# Altium PCB Nitrous_Controller_Panel.PcbDoc
Units mil, origin at the board's own origin, x right, y up, seen from the top; angles counter-clockwise.
Board outline 5350 x 5850 mil, 2 copper layers (Top Layer, Bottom Layer); 74 components, 0 nets, 388 pads, 10 vias.
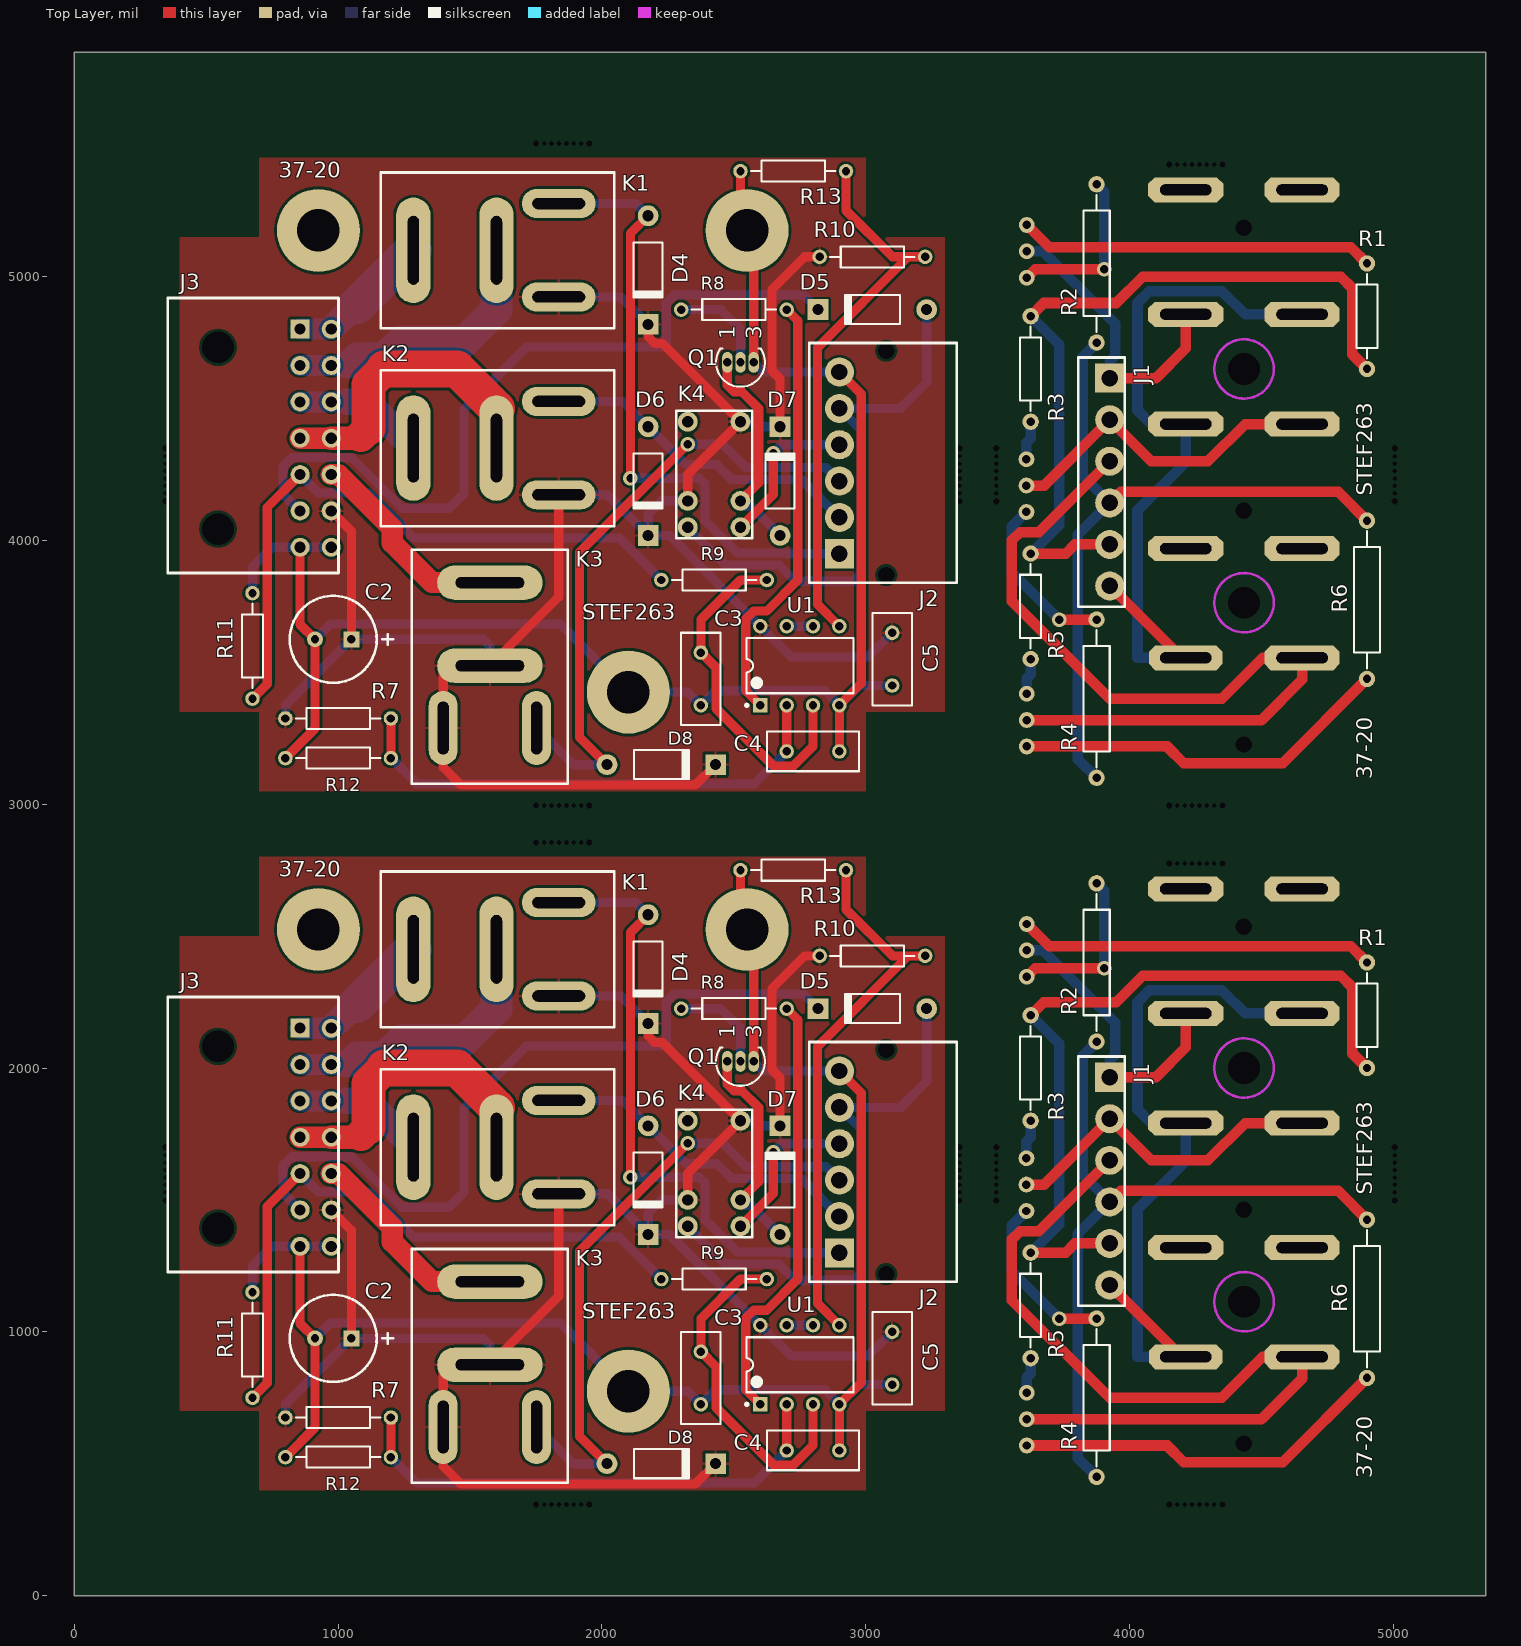
[diagram p0: Top Layer view]
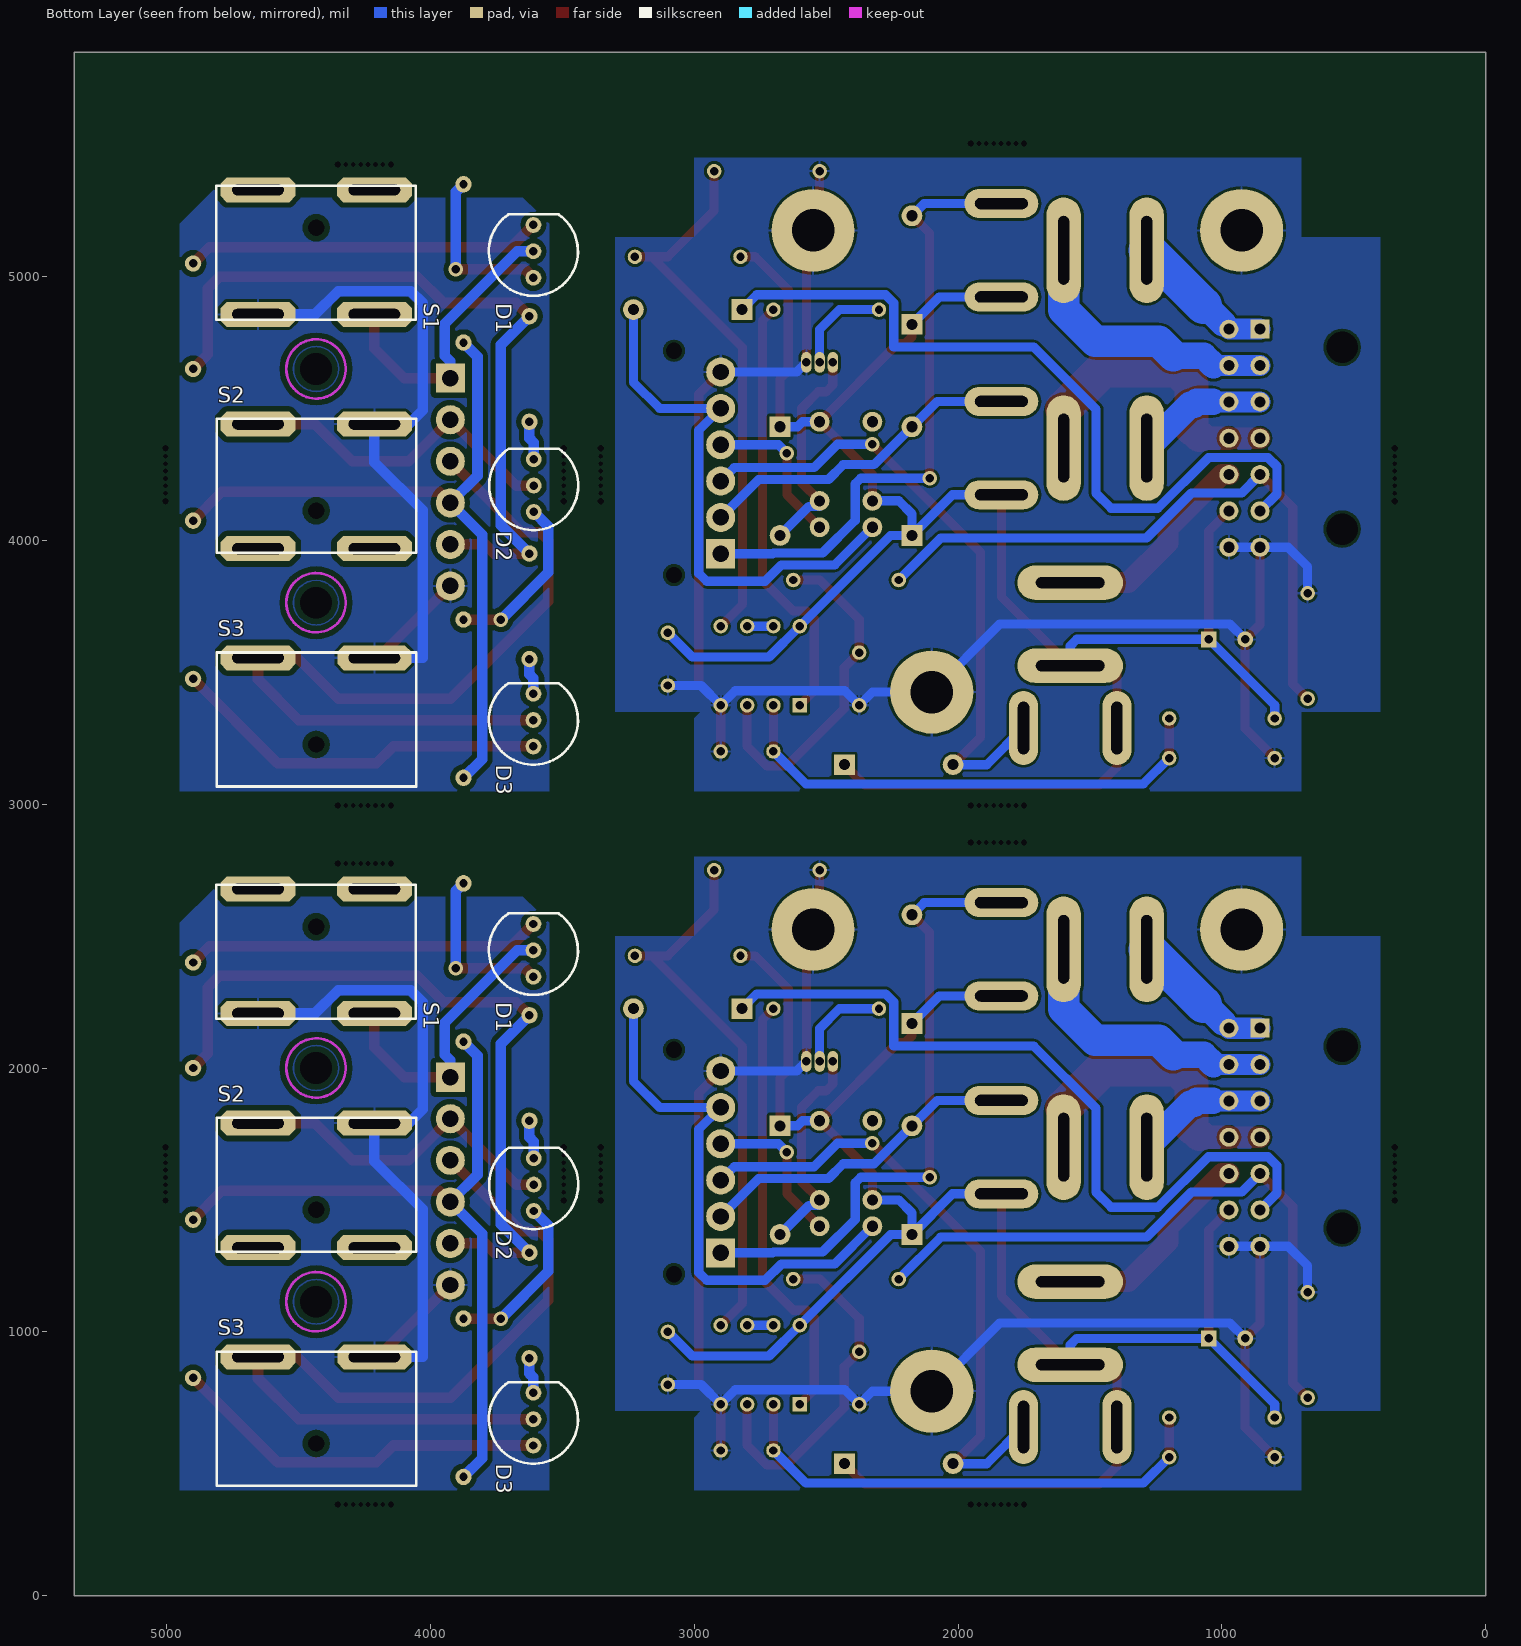
[diagram p1: Bottom Layer view, seen from below]

## Layer stack, top to bottom
Top Solder: solder mask 0.4, Solder Resist, Dk 3.5
Top Layer: signal copper 1.4
Dielectric 1: dielectric 12.6, FR-4, Dk 4.8
Bottom Layer: signal copper 1.4
Bottom Solder: solder mask 0.4, Solder Resist, Dk 3.5

## Board outline
0,0 0,5850 5350,5850 5350,0

## Design rules (kind name [scope] priority, off if disabled: settings)
Clearance [All] p1: gap=10 ignorepadtopadclearanceinfootprint=FALSE
ComponentClearance [All] p1: gap=5 collisioncheckmode=3 verticalgap=10 showdistances=FALSE
PolygonConnect [All] p1: connectstyle=Relief reliefconductorwidth=10 reliefentries=4 polygonreliefangle="90 Angle" airgapwidth=10
RoutingVias [All] p1: holewidth=28 width=50 viastyle="Through Hole" minholewidth=28 minwidth=50 maxholewidth=28 maxwidth=50
ShortCircuit [All] p1: allowed=TRUE
SolderMaskExpansion [All] p1: expansion=4
UnpouredPolygon [All] p1 off:
Width [All] p1: maxlimit=200 minlimit=10 preferedwidth=35
27 further rules are at their usual default settings.

## Components (designator, comment, footprint, x,y, rotation, side; value= is the part's Value field where it differs from the comment)
C2 "Cap Pol1" RB_3.5MM 1050,3625 r180 top value=100uF/25V
C2 "Cap Pol1" RB_3.5MM 1050,975 r180 top value=100uF/25V
C3 "Cap" RAD-0.2 2375,3475 r90 top value=1uF/16V
C3 "Cap" RAD-0.2 2375,825 r90 top value=1uF/16V
C4 "Cap" RAD-0.2 2800,3200 r180 top value=1uF/16V
C4 "Cap" RAD-0.2 2800,550 r180 top value=1uF/16V
C5 "Cap" RAD-0.2 3100,3550 r90 top value=1uF/16V
C5 "Cap" RAD-0.2 3100,900 r90 top value=1uF/16V
D1 "NOS" DIODE_2COLOR_RAD 3660,5246 r270 bottom
D1 "NOS" DIODE_2COLOR_RAD 3660,2596 r270 bottom
D2 "HEATER" DIODE_2COLOR_RAD 3659,4358 r270 bottom
D2 "HEATER" DIODE_2COLOR_RAD 3659,1708 r270 bottom
D3 "PURGE" DIODE_2COLOR_RAD 3660,3469 r270 bottom
D3 "PURGE" DIODE_2COLOR_RAD 3660,819 r270 bottom
D4 "1N4001" DO-41 2175,5025 r270 top
D4 "1N4001" DO-41 2175,2375 r270 top
D5 "1N4001" DO-41 3025,4875 r180 top
D5 "1N4001" DO-41 3025,2225 r180 top
D6 "1N4001" DO-41 2175,4225 r270 top
D6 "1N4001" DO-41 2175,1575 r270 top
D7 "1N4001" DO-41 2675,4225 r90 top
D7 "1N4001" DO-41 2675,1575 r90 top
D8 "1N4001" DO-41 2225,3150 r0 top
D8 "1N4001" DO-41 2225,500 r0 top
J1 "FP_CONNECTOR" MOLEX_51036_6POS 3925,4614.96 r270 top
J1 "FP_CONNECTOR" MOLEX_51036_6POS 3925,1964.96 r270 top
J2 "FP_CONNECTOR" MOLEX_5329_6POS_RA 3077.17,3868.7 r90 top
J2 "FP_CONNECTOR" MOLEX_5329_6POS_RA 3077.17,1218.7 r90 top
J3 "Molex 1723161114" MOLEX_ULTRA_FIT_14_POS_RA 855.42,4800.87 r270 top
J3 "Molex 1723161114" MOLEX_ULTRA_FIT_14_POS_RA 855.42,2150.87 r270 top
K1 "ACV31012" RL_MICRO_ISO_ACV 1836,5277 r180 top
K1 "ACV31012" RL_MICRO_ISO_ACV 1836,2627 r180 top
K2 "ACV31012" RL_MICRO_ISO_ACV 1836,4527 r180 top
K2 "ACV31012" RL_MICRO_ISO_ACV 1836,1877 r180 top
K3 "ACV31012" RL_MICRO_ISO_ACV 1752,3289 r90 top
K3 "ACV31012" RL_MICRO_ISO_ACV 1752,639 r90 top
K4 "G5V-1-2 DC12" RL_G5V-1 2525,4050 r90 top
K4 "G5V-1-2 DC12" RL_G5V-1 2525,1400 r90 top
Q1 "2N3904" TO-92 2525,4675 r90 top
Q1 "2N3904" TO-92 2525,2025 r90 top
R1 "Res1" AXIAL-0.4#1 4900,4850 r90 top value=4.7k
R1 "Res1" AXIAL-0.4#1 4900,2200 r90 top value=4.7k
R2 "Res1" AXIAL-0.6 3875,5050 r90 top value=470/1W
R2 "Res1" AXIAL-0.6 3875,2400 r90 top value=470/1W
R3 "Res1" AXIAL-0.4#1 3625,4650 r270 top value=4.7k
R3 "Res1" AXIAL-0.4#1 3625,2000 r270 top value=4.7k
R4 "Res1" AXIAL-0.6 3875,3400 r90 top value=470/1W
R4 "Res1" AXIAL-0.6 3875,750 r90 top value=470/1W
R5 "Res1" AXIAL-0.4#1 3625,3750 r270 top value=4.7k
R5 "Res1" AXIAL-0.4#1 3625,1100 r270 top value=4.7k
R6 "Res1" AXIAL-0.6 4900,3775 r270 top value=470/1W
R6 "Res1" AXIAL-0.6 4900,1125 r270 top value=470/1W
R7 "Res1" AXIAL-0.4#2 1000,3325 r0 top value=8.2K
R7 "Res1" AXIAL-0.4#2 1000,675 r0 top value=8.2K
R8 "Res1" AXIAL-0.4#2 2500,4875 r180 top value=10K
R8 "Res1" AXIAL-0.4#2 2500,2225 r180 top value=10K
R9 "Res1" AXIAL-0.4#2 2425,3850 r180 top value=10K
R9 "Res1" AXIAL-0.4#2 2425,1200 r180 top value=10K
R10 "Res1" AXIAL-0.4#2 3025,5075 r0 top value=10K
R10 "Res1" AXIAL-0.4#2 3025,2425 r0 top value=10K
R11 "Res1" AXIAL-0.4#2 675,3600 r270 top value=10K
R11 "Res1" AXIAL-0.4#2 675,950 r270 top value=10K
R12 "Res1" AXIAL-0.4#2 1000,3175 r180 top value=1K
R12 "Res1" AXIAL-0.4#2 1000,525 r180 top value=1K
R13 "Res1" AXIAL-0.4#2 2725,5400 r0 top value=10K
R13 "Res1" AXIAL-0.4#2 2725,2750 r0 top value=10K
S1 "NOS_SW" PA4_DPST 4213,4857 r90 bottom
S1 "NOS_SW" PA4_DPST 4213,2207 r90 bottom
S2 "HEATER_SW" PA4_DPST 4654,4441 r270 bottom
S2 "HEATER_SW" PA4_DPST 4654,1791 r270 bottom
S3 "PURGE_SW" PA4_SPST 4654,3555 r270 bottom
S3 "PURGE_SW" PA4_SPST 4654,905 r270 bottom
U1 "LM358" DIP-8 2750,3525 r90 top
U1 "LM358" DIP-8 2750,875 r90 top

## Footprints (in the part's own frame and the unit in brackets; to place one, negate y for a bottom-side part, rotate by r counter-clockwise, add the part's x,y. Pads: shape width x height; smd on the part's side, far side on the other; paste and mask are expansions set on the pad)
AXIAL-0.4#1 [mil] "Axial Device, Thru-Hole; 2 Leads; 0.4 in Pin Spacing"
  round 62 hole 32: 1(-200,0) 2(200,0)
  silkscreen extent -160,-40 160,40
AXIAL-0.4#2 [mil] "Axial Device, Thru-Hole; 2 Leads; 0.4 in Pin Spacing"
  round 55.12 hole 32: 1(-200,0) 2(200,0)
  silkscreen extent -160,-40 160,40
AXIAL-0.6 [mil] "Axial Device, Thru-Hole; 2 Leads; 0.6 in Pin Spacing"
  round 62 hole 32: 1(-300,0) 2(300,0)
  silkscreen extent -260,-50 260,50
DIODE_2COLOR_RAD [mil]
  round 60 hole 32: 1(50,50) 2(150,50) 3(250,50)
  silkscreen extent 10,-119 319,219
DIP-8 [mil] "DIP; 8 Leads; Row Spacing 7.62 mm; Pitch 2.54 mm"
  rect 55x55 hole 32: 1(-150,150)
  round 55 hole 32: 2(-150,50) 3(-150,-50) 4(-150,-150) 5(150,-150) 6(150,-50) 7(150,50) 8(150,150)
  silkscreen extent -155,-203 104,206, body extent -142,-203 142,203, height 200
DO-41 [mm] "Diode, Axial; Body 5.2 x 2.7 mm (LxDia. max), Lead Dia. 0.86 mm (max)"
  round 2 hole 1.067: 1(-5.23,0)
  rect 2x2 hole 1.067: 2(5.23,0)
  silkscreen extent -2.65,-1.4 2.75,1.4
MOLEX_5329_6POS_RA [mm]
  rect 2.8x2.8 hole 1.575: 1(2.05,4.5)
  round 2.8 hole 1.575: 2(5.55,4.5) 3(9.05,4.5) 4(12.55,4.5) 5(16.05,4.5) 6(19.55,4.5)
  round 0 hole 1.575: ""(0,0) ""(21.6,0)
  silkscreen extent -0.75,-6.8 22.35,7.4
MOLEX_51036_6POS [mm]
  rect 2.8x2.8 hole 1.575: 1(0,0)
  round 2.8 hole 1.575: 2(4,0) 3(8,0) 4(12,0) 5(16,0) 6(20,0)
  silkscreen extent -2,-3.05 22,1.45
MOLEX_ULTRA_FIT_14_POS_RA [mil]
  rect 72x72 hole 42: 1(0,0)
  round 72 hole 42: 2(0,118.11) 3(137.8,0) 4(137.8,118.11) 5(275.59,0) 6(275.59,118.11) 7(413.39,0) 8(413.39,118.11) 9(551.18,0) 10(551.18,118.11) 11(688.98,0) 12(688.98,118.11) 13(826.77,0) 14(826.77,118.11)
  round 0 hole 120: ""(68.9,-311.42) ""(757.87,-311.42)
  silkscreen extent -118,-501 924,145
PA4_DPST [mil] "DPST push switch"
  oct 95x285 hole 42 slot 195 at 90 deg: 1(0,0) 2(0,441) 3(472,0) 4(472,441)
  round 0 hole 62: ""(328.5,220.5)
  silkscreen extent -20,-157 488,600
PA4_SPST [mil] "SPST push switch"
  oct 95x285 hole 42 slot 195 at 90 deg: 1(0,0)
  oct 95x280 hole 42 slot 195 at 90 deg: 2(0,441)
  round 0 hole 62: ""(328.5,220.5)
  silkscreen extent -20,-157 488,600
RAD-0.2 [mil] "Radial Cap, Thru-Hole; 2 Leads; 0.2 in Pin Spacing"
  round 55 hole 32: 1(-100,0) 2(100,0)
  silkscreen extent -175,-75 175,75
RB_3.5MM [mil]
  rect 60x60 hole 32: 1(0,0)
  round 60 hole 32: 2(138,0)
  silkscreen extent -158,-165 234,165
RL_G5V-1 [mil]
  round 75 hole 42: 1(0,0) 2(100,0) 5(400,0) 6(400,200) 9(100,200) 10(0,200)
  silkscreen extent -42,-44 442,243
RL_MICRO_ISO_ACV [mil] "Micro-ISO Relay ACV series"
  oval 280x110 hole 42 slot 200 at 0 deg: 1(0,0) 2(0,354)
  oval 130x400 hole 42 slot 260 at 90 deg: 3(551,177) 5(236,177)
  silkscreen extent -211,-118 675,473
TO-92 [mm] "TO, Flat Index; 3 In-Line, Axial Leads; Body Dia. 4.6mm; Leads 0.41 x 0.39 mm (max)"
  oval 2x1 hole 0.813: 1(0,1.27) 2(0,0) 3(0,-1.27)
  silkscreen extent -2.34,-2.34 1.35,2.34

## Part data
C2 C2: "UBW1E101MPD1TD", LatestRevisionDate=17-Jul-2002, LatestRevisionNote="Re-released for DXP Platform.", PackageDescription="Polarized Capacitor (Radial); 2 Leads", PackageReference=RB7.6-15, Published=8-Jun-2000, Publisher="Altium Limited"
C3 C3 C4 C4 C5 C5: "FA26X8R1E105KNU06", LatestRevisionDate=17-Jul-2002, LatestRevisionNote="Re-released for DXP Platform.", PackageDescription="Radial Cap, Thru-Hole; 2 Leads; 0.3 in Pin Spacing", PackageReference=RAD-0.3, Published=8-Jun-2000, Publisher="Altium Limited"
D1 D1 D2 D2 D3 D3: library part LED_DUAL_COLOR_CC, "Red/Blue LED", PartNo=XLMDKCBD59M
D4 D4 D5 D5 D6 D6 D7 D7 D8 D8: library part "Diode 1N4001", "1 Amp General Purpose Rectifier", Code_JEDEC=DO-204-AL, ComponentLink1Description="Manufacturer Link", ComponentLink1URL=http://www.fairchildsemi.com/, ComponentLink2Description=Datasheet, ComponentLink2URL=http://www.fairchildsemi.com/ds/1N%2F1N4001.pdf, DatasheetVersion=1998, LatestRevisionDate=17-Jul-2002, LatestRevisionNote="Re-released for DXP Platform.", PackageDescription="Diode, Axial; Body 5.2 x 2.7 mm (LxDia. max), Lead Dia. 0.86 mm (max)", PackageReference=DO-41, PackageVersion=Aug-1999, Published=8-Jun-2000, Publisher="Altium Limited"
J1 J1 J2 J2: library part "Header 6", "Header, 6-Pin", LatestRevisionDate=17-Jul-2002, LatestRevisionNote="Re-released for DXP Platform.", Publisher="Altium Limited"
J3 J3: library part "Header 7X2", "Header, 7-Pin, Dual row", LatestRevisionDate=17-Jul-2002, LatestRevisionNote="Re-released for DXP Platform.", Publisher="Altium Limited"
K1 K1 K2 K2 K3 K3: library part Relay-SPST, "Single-Pole Single-Throw Relay", LatestRevisionDate=17-Jul-2002, LatestRevisionNote="Re-released for DXP Platform.", PackageReference=MODULE4, Published=24-Mar-1999, Publisher="Altium Limited"
K4 K4: library part Relay-SPDT, "Single-Pole Dual-Throw Relay", LatestRevisionDate=17-Jul-2002, LatestRevisionNote="Re-released for DXP Platform.", PackageReference=MODULE5B, Published=24-Mar-1999, Publisher="Altium Limited"
Q1 Q1: library part NPN, "NPN Bipolar Transistor", Code_JEDEC=TO-226-AA, LatestRevisionDate=17-Jul-2002, LatestRevisionNote="Re-released for DXP Platform.", PackageDescription="TO, Flat Index; 3 In-Line, Axial Leads; Body Dia. 4.8mm; Leads 0.55 x 0.51 mm (max)", PackageReference=TO-226-AA, Published=8-Jun-2000, Publisher="Altium Limited"
R1 R1 R2 R2 R3 R3 R4 R4 R5 R5 R6 R6 R7 R7 R8 R8 R9 R9 R10 R10 R11 R11 R12 R12 R13 R13: "Resistor", LatestRevisionDate=17-Jul-2002, LatestRevisionNote="Re-released for DXP Platform.", PackageDescription="Axial Device, Thru-Hole; 2 Leads; 0.3 in Pin Spacing", PackageReference=AXIAL-0.3, Published=8-Jun-2000, Publisher="Altium Limited"
S1 S1 S2 S2 S3 S3: library part SW-SPST, "Single-Pole, Single-Throw Switch", LatestRevisionDate=17-Jul-2002, LatestRevisionNote="Re-released for DXP Platform.", PackageDescription="Switch; 2 Leads", PackageReference=SPST-2, Published=24-Mar-1999, Publisher="Altium Limited"

## Free pads (board coordinates)
  round 0 hole 24: ""(345,1498) ""(345,1700) ""(345,4148) ""(345,4350) ""(1750,345) ""(1750,2855) ""(1750,2995) ""(1750,5505) ""(1952,345) ""(1952,2855) ""(1952,2995) ""(1952,5505) ""(3355,1498) ""(3355,1700) ""(3355,4148) ""(3355,4350) ""(3495,1498) ""(3495,1700) ""(3495,4148) ""(3495,4350) ""(4150,345) ""(4150,2775) ""(4150,2995) ""(4150,5425) ""(4352,345) ""(4352,2775) ""(4352,2995) ""(4352,5425) ""(5005,1498) ""(5005,1700) ""(5005,4148) ""(5005,4350)
  round 0 hole 18: ""(345,1529) ""(345,1557) ""(345,1585) ""(345,1613) ""(345,1641) ""(345,1669) ""(345,4179) ""(345,4207) ""(345,4235) ""(345,4263) ""(345,4291) ""(345,4319) ""(1781,345) ""(1781,2855) ""(1781,2995) ""(1781,5505) ""(1809,345) ""(1809,2855) ""(1809,2995) ""(1809,5505) ""(1837,345) ""(1837,2855) ""(1837,2995) ""(1837,5505) ""(1865,345) ""(1865,2855) ""(1865,2995) ""(1865,5505) ""(1893,345) ""(1893,2855) ""(1893,2995) ""(1893,5505) ""(1921,345) ""(1921,2855) ""(1921,2995) ""(1921,5505) ""(3355,1529) ""(3355,1557) ""(3355,1585) ""(3355,1613) ""(3355,1641) ""(3355,1669) ""(3355,4179) ""(3355,4207) ""(3355,4235) ""(3355,4263) ""(3355,4291) ""(3355,4319) ""(3495,1529) ""(3495,1557) ""(3495,1585) ""(3495,1613) ""(3495,1641) ""(3495,1669) ""(3495,4179) ""(3495,4207) ""(3495,4235) ""(3495,4263) ""(3495,4291) ""(3495,4319) ""(4181,345) ""(4181,2775) ""(4181,2995) ""(4181,5425) ""(4209,345) ""(4209,2775) ""(4209,2995) ""(4209,5425) ""(4237,345) ""(4237,2775) ""(4237,2995) ""(4237,5425) ""(4265,345) ""(4265,2775) ""(4265,2995) ""(4265,5425) ""(4293,345) ""(4293,2775) ""(4293,2995) ""(4293,5425) ""(4321,345) ""(4321,2775) ""(4321,2995) ""(4321,5425) ""(5005,1529) ""(5005,1557) ""(5005,1585) ""(5005,1613) ""(5005,1641) ""(5005,1669) ""(5005,4179) ""(5005,4207) ""(5005,4235) ""(5005,4263) ""(5005,4291) ""(5005,4319)
  round 315 hole 161: ""(925,2525) ""(925,5175) ""(2100,775) ""(2100,3425) ""(2550,2525) ""(2550,5175)
  round 0 hole 120 unplated: ""(4434,1114) ""(4434,2000) ""(4434,3764) ""(4434,4650)

## Via types
v1: diameter 55, hole 32, Top Layer to Bottom Layer, 10 vias

## Nets (pads, with @x,y where several pads share a name; then routed paths per layer and width w, separated by ;. In a path a pad name is that pad's centre, name@x,y a point inside that pad or via, vN(x,y) a via of type N, cw(c..) or ccw(c..) an arc to the next point about the centre after c; other vN are vias at no path point)
pads on no net: C2.1 C2.2 C3.1 C3.2 C4.1 C4.2 C5.1 C5.2 D1.1 D1.2 D1.3 D2.1 D2.2 D2.3 D3.1 D3.2 D3.3 D4.1 D4.2 D5.1 D5.2 D6.1 D6.2 D7.1 D7.2 D8.1 D8.2 J1.1 J1.2 J1.3 J1.4 J1.5 J1.6 J2. J2.1 J2.2 J2.3 J2.4 J2.5 J2.6 J3. J3.1 J3.2 J3.3 J3.4 J3.5 J3.6 J3.7 J3.8 J3.9 J3.10 J3.11 J3.12 J3.13 J3.14 K1.1 K1.2 K1.3 K1.5 K2.1 K2.2 K2.3 K2.5 K3.1 K3.2 K3.3 K3.5 K4.1 K4.2 K4.5 K4.6 K4.9 K4.10 Q1.1 Q1.2 Q1.3 R1.1 R1.2 R2.1 R2.2 R3.1 R3.2 R4.1 R4.2 R5.1 R5.2 R6.1 R6.2 R7.1 R7.2 R8.1 R8.2 R9.1 R9.2 R10.1 R10.2 R11.1 R11.2 R12.1 R12.2 R13.1 R13.2 S1. S1.1 S1.2 S1.3 S1.4 S2. S2.1 S2.2 S2.3 S2.4 S3. S3.1 S3.2 U1.1 U1.2 U1.3 U1.4 U1.5 U1.6 U1.7 U1.8
copper on no net: | length 118723.9
  Top Layer w35: 675,750 731,806 731,1475.27 855.42,1599.69 ; 675,3400 731,3456 731,4125.27 855.42,4249.69 ; 800,525 912,637 912,975 855.42,1031.58 855.42,1324.1 ; 800,3175 912,3287 912,3625 855.42,3681.58 855.42,3974.1 ; 973.53,1461.9 1050,1385.43 1050,975 ; 973.53,4111.9 1050,4035.43 1050,3625 ; 1200,525 1200,675 ; 1200,3175 1200,3325 ; 1450,1190 1575,1190 ; 1450,3840 1575,3840 ; 1836,1523 1836,1136 1575,875 1398,875 1398,639 1398,490 1465,423 2353.91,423 2430.91,500 ; 1836,4173 1836,3786 1575,3525 1398,3525 1398,3289 1398,3140 1465,3073 2353.91,3073 2430.91,3150 ; 2019.09,500 1915,604.09 1915,1305 v1(2325,1715) ; 2019.09,3150 1915,3254.09 1915,3955 v1(2325,4365) ; v1(2108,1586) 2108,2513.91 2175,2580.91 ; v1(2108,4236) 2108,5163.91 2175,5230.91 ; 2175,2169.09 2175,2122 2200,2097 2228,2097 2525,1800 2325,1600 2325,1500 ; 2175,4819.09 2175,4772 2200,4747 2228,4747 2525,4450 2325,4250 2325,4150 ; 2475,2025 2475,1939 2500,1914 2530,1914 2594,1850 2594,1569 2525,1500 ; 2475,4675 2475,4589 2500,4564 2530,4564 2594,4500 2594,4219 2525,4150 ; 2525,1400 2649,1524 v1(2649,1681) ; 2525,2750 2525,2525 2550,2525 2575,2500 2575,2025 ; 2525,4050 2649,4174 v1(2649,4331) ; 2525,5400 2525,5175 2550,5175 2575,5150 2575,4675 ; 2600,725 2545,780 2545,1052 2575,1082 2624,1082 2742,1200 2742,2183 2700,2225 ; 2600,3375 2545,3430 2545,3702 2575,3732 2624,3732 2742,3850 2742,4833 2700,4875 ; 2625,1200 2525,1200 2375,1050 2375,925 2432,868 2432,713 2650,495 2725,495 2800,570 2800,725 ; 2625,3850 2525,3850 2375,3700 2375,3575 2432,3518 2432,3363 2650,3145 2725,3145 2800,3220 2800,3375 ; 2675,1780.91 2675,1963 2644,1994 2644,2300 2769,2425 2825,2425 ; 2675,4430.91 2675,4613 2644,4644 2644,4950 2769,5075 2825,5075 ; 2700,550 2700,725 ; 2700,3200 2700,3375 ; 2900,550 2900,725 2983,808 2983,1905.39 2900,1988.39 ; 2900,1025 2817,1108 2817,2081 3161,2425 ; 2900,3200 2900,3375 2983,3458 2983,4555.39 2900,4638.39 ; 2900,3675 2817,3758 2817,4731 3161,5075 ; 2925,2750 2925,2601 3101,2425 3161,2425 ; 2925,5400 2925,5251 3101,5075 3161,5075 ; 3225,2425 3161,2425 ; 3225,5075 3161,5075
  Top Layer w40: 3609,1558 3675.52,1558 3925,1807.48 4082.48,1650 4297,1650 4438,1791 4654,1791 ; 3609,4208 3675.52,4208 3925,4457.48 4082.48,4300 4297,4300 4438,4441 4654,4441 ; 3610,569 4142,569 4206,505 4580,505 4900,825 ; 3610,669 4500,669 4654,823 4654,905 4505,905 4350,750 3924.22,750 3554,1120.22 3554,1350 3585,1381 3656,1381 3925,1650 ; 3610,2346 3642,2378 v1(3904,2378) ; 3610,2546 3695,2461 4839,2461 4900,2400 ; 3610,3219 4142,3219 4206,3155 4580,3155 4900,3475 ; 3610,3319 4500,3319 4654,3473 4654,3555 4505,3555 4350,3400 3924.22,3400 3554,3770.22 3554,4000 3585,4031 3656,4031 3925,4300 ; 3610,4996 3642,5028 v1(3904,5028) ; 3610,5196 3695,5111 4839,5111 4900,5050 ; 3625,1300 3757.96,1300 3793,1335.04 3925,1335.04 ; 3625,2200 3675,2250 3950,2250 4050,2350 4800,2350 4845,2305 4845,2055 4900,2000 ; 3625,3950 3757.96,3950 3793,3985.04 3925,3985.04 ; 3625,4850 3675,4900 3950,4900 4050,5000 4800,5000 4845,4955 4845,4705 4900,4650 ; v1(3733,1050) 3875,1050 ; v1(3733,3700) 3875,3700 ; 3925,1177.56 4197.56,905 4213,905 ; 3925,1492.52 3966.48,1534 4791,1534 4900,1425 ; 3925,1964.96 4100,1964.96 4213,2077.96 4213,2207 ; 3925,3827.56 4197.56,3555 4213,3555 ; 3925,4142.52 3966.48,4184 4791,4184 4900,4075 ; 3925,4614.96 4100,4614.96 4213,4727.96 4213,4857
  Top Layer w80: 855.42,1737.49 973.53,1737.49 ; 855.42,4387.49 973.53,4387.49 ; 973.53,1599.69 1000.31,1599.69 1205,1395 1205,1340 1355,1190 1450,1190 ; 973.53,4249.69 1000.31,4249.69 1205,4045 1205,3990 1355,3840 1450,3840 ; 1077.49,1737.49 1085,1745 ; 1077.49,4387.49 1085,4395
  Top Layer w90: 973.53,1737.49 1077.49,1737.49 ; 973.53,4387.49 1077.49,4387.49
  Top Layer w120: 1085,1745 1115,1775 ; 1085,4395 1115,4425 ; 1600,1700 1600,1850 ; 1600,4350 1600,4500
  Top Layer w130: 1115,1775 1115,1940 1175,2000 ; 1115,4425 1115,4590 1175,4650
  Top Layer w140: 1175,2000 1450,2000 1600,1850 ; 1175,4650 1450,4650 1600,4500
  Bottom Layer w35: 675,1150 675,1250 749.1,1324.1 855.42,1324.1 973.53,1324.1 ; 675,3800 675,3900 749.1,3974.1 855.42,3974.1 973.53,3974.1 ; 800,675 800,725 1050,975 1550,975 1575,950 1575,875 ; 800,3325 800,3375 1050,3625 1550,3625 1575,3600 1575,3525 ; 855.42,1461.9 791,1526.32 791,1630 825,1664 1051,1664 1243,1472 1420,1472 1477,1529 1477,1847 1713,2083 2244,2083 2244,2250 2275,2281 2763.09,2281 2819.09,2225 ; 855.42,1599.69 925.11,1530 1115,1530 1286,1359 2066,1359 2225,1200 ; 855.42,4111.9 791,4176.32 791,4280 825,4314 1051,4314 1243,4122 1420,4122 1477,4179 1477,4497 1713,4733 2244,4733 2244,4900 2275,4931 2763.09,4931 2819.09,4875 ; 855.42,4249.69 925.11,4180 1115,4180 1286,4009 2066,4009 2225,3850 ; 912,975 970,1033 1842,1033 2100,775 2325,775 2375,725 2430,780 2845,780 2900,725 2975,800 3100,800 ; 912,3625 970,3683 1842,3683 2100,3425 2325,3425 2375,3375 2430,3430 2845,3430 2900,3375 2975,3450 3100,3450 ; 1200,525 1298,427 2577,427 2700,550 ; 1200,3175 1298,3077 2577,3077 2700,3200 ; 1752,639 1891,500 2019.09,500 ; 1752,3289 1891,3150 2019.09,3150 ; 1836,1523 2021.09,1523 2175,1369.09 ; 1836,1877 2078.91,1877 2175,1780.91 2318.53,1637.37 2435,1637.37 2491.37,1581 2756.2,1581 2900,1437.2 ; 1836,2273 2071.09,2273 2175,2169.09 ; 1836,2627 2128.91,2627 2175,2580.91 ; 1836,4173 2021.09,4173 2175,4019.09 ; 1836,4527 2078.91,4527 2175,4430.91 2318.53,4287.37 2435,4287.37 2491.37,4231 2756.2,4231 2900,4087.2 ; 1836,4923 2071.09,4923 2175,4819.09 ; 1836,5277 2128.91,5277 2175,5230.91 ; v1(2108,1586) 2369,1586 2390,1565 2390,1426 2513.78,1302.22 2699.78,1302.22 2702.59,1299.41 2900,1299.41 ; v1(2108,4236) 2369,4236 2390,4215 2390,4076 2513.78,3952.22 2699.78,3952.22 2702.59,3949.41 2900,3949.41 ; 2300,2225 2450,2225 2525,2150 2525,2025 ; 2300,4875 2450,4875 2525,4800 2525,4675 ; 2325,1400 2467.78,1257.22 2669.78,1257.22 2732,1195 2953,1195 2983,1225 2983,1767.59 2900,1850.59 3131.5,1850.59 3230.91,1950 3230.91,2225 ; 2325,1500 2225,1500 2175,1450 2175,1369.09 ; v1(2325,1715) 2457.47,1715 2546.47,1626 2849,1626 2900,1575 ; 2325,4050 2467.78,3907.22 2669.78,3907.22 2732,3845 2953,3845 2983,3875 2983,4417.59 2900,4500.59 3131.5,4500.59 3230.91,4600 3230.91,4875 ; 2325,4150 2225,4150 2175,4100 2175,4019.09 ; v1(2325,4365) 2457.47,4365 2546.47,4276 2849,4276 2900,4225 ; 2525,1500 2525,1479 2565.09,1479 2675,1369.09 ; 2525,1800 2590,1800 2609.09,1780.91 2675,1780.91 ; 2525,4150 2525,4129 2565.09,4129 2675,4019.09 ; 2525,4450 2590,4450 2609.09,4430.91 2675,4430.91 ; 2575,2025 2611.61,1988.39 2900,1988.39 ; 2575,4675 2611.61,4638.39 2900,4638.39 ; v1(2649,1681) 2680.8,1712.8 2900,1712.8 ; v1(2649,4331) 2680.8,4362.8 2900,4362.8 ; 2700,1025 2800,1025 ; 2700,3675 2800,3675 ; 3100,1000 3008,908 2717,908 2600,1025 2255.91,1369.09 2175,1369.09 ; 3100,3650 3008,3558 2717,3558 2600,3675 2255.91,4019.09 2175,4019.09
  Bottom Layer w40: 3609,1458 3554,1403 3554,1229 v1(3733,1050) ; 3609,1658 3609,1721 3625,1737 3625,1800 ; 3609,4108 3554,4053 3554,3879 v1(3733,3700) ; 3609,4308 3609,4371 3625,4387 3625,4450 ; 3610,769 3610,827 3625,842 3625,900 ; 3610,2446 3671,2446 3946,2171 3946,2050 3925,2029 3925,1964.96 ; 3610,3419 3610,3477 3625,3492 3625,3550 ; 3610,5096 3671,5096 3946,4821 3946,4700 3925,4679 3925,4614.96 ; 3625,1300 3733,1408 3733,2092 3625,2200 ; 3625,3950 3733,4058 3733,4742 3625,4850 ; 3875,450 3804,521 3804,1371.52 3925,1492.52 3822,1595.52 3822,2047 3875,2100 ; 3875,2700 3904,2671 v1(3904,2378) ; 3875,3100 3804,3171 3804,4021.52 3925,4142.52 3822,4245.52 3822,4697 3875,4750 ; 3875,5350 3904,5321 v1(3904,5028) ; 4213,905 4030,905 4030,1464 4213,1647 4213,1791 4082,1791 4030,1843 4030,2250 4075,2295 4350,2295 4438,2207 4654,2207 ; 4213,3555 4030,3555 4030,4114 4213,4297 4213,4441 4082,4441 4030,4493 4030,4900 4075,4945 4350,4945 4438,4857 4654,4857
  Bottom Layer w80: 855.42,1875.28 973.53,1875.28 1034.72,1875.28 ; 855.42,2013.08 973.53,2013.08 1031.92,2013.08 ; 855.42,2150.87 973.53,2150.87 995,2172.35 ; 855.42,4525.28 973.53,4525.28 1034.72,4525.28 ; 855.42,4663.08 973.53,4663.08 1031.92,4663.08 ; 855.42,4800.87 973.53,4800.87 995,4822.35 ; 1062.65,2240 1070,2240 ; 1062.65,4890 1070,4890
  Bottom Layer w100: 995,2172.35 1062.65,2240 ; 995,4822.35 1062.65,4890 ; 1031.92,2013.08 1068.84,2050 1185,2050 ; 1031.92,4663.08 1068.84,4700 1185,4700 ; 1034.72,1875.28 1094.72,1875.28 1105,1865 1120,1865 1285,1700 ; 1034.72,4525.28 1094.72,4525.28 1105,4515 1120,4515 1285,4350
  Bottom Layer w120: 1185,2050 1240,2105 1480,2105 1600,2225 1600,2450 ; 1185,4700 1240,4755 1480,4755 1600,4875 1600,5100
  Bottom Layer w140: 1070,2240 1282.5,2452.5 1285,2450 ; 1070,4890 1282.5,5102.5 1285,5100

## Polygon pours and split planes (outlines as drawn)
no net on Bottom Layer "Bottom Layer-GND" (solid, pour order 60): 4950,3050 4950,5200 4800,5350 4750,5300 3650,5300 3550,5200 3550,3050
no net on Bottom Layer "Bottom Layer-GND" (solid, pour order 58): 4950,400 4950,2550 4800,2700 4750,2650 3650,2650 3550,2550 3550,400
no net on Bottom Layer "bottom_layer_gnd" (solid, remove dead copper, pour order 54): 700,3350 700,3050 3000,3050 3000,3325 2975,3350 3300,3350 3300,5150 3000,5150 3000,5450 700,5450 700,5150 400,5150 400,3350
no net on Bottom Layer "bottom_layer_gnd" (solid, remove dead copper, pour order 50): 700,700 700,400 3000,400 3000,675 2975,700 3300,700 3300,2500 3000,2500 3000,2800 700,2800 700,2500 400,2500 400,700
no net on Top Layer "top_layer_acc" (solid, remove dead copper, pour order 56): 400,3350 700,3350 700,3050 3000,3050 3000,3350 3300,3350 3300,5150 3000,5150 3000,5450 700,5450 700,5150 400,5150
no net on Top Layer "top_layer_acc" (solid, remove dead copper, pour order 52): 400,700 700,700 700,400 3000,400 3000,700 3300,700 3300,2500 3000,2500 3000,2800 700,2800 700,2500 400,2500

## Keep-outs
Keep-Out Layer:
  circle w10: c4434,3764 r112.5
  circle w10: c4434,4650 r112.5
  circle w10: c4434,1114 r112.5
  circle w10: c4434,2000 r112.5

## Silkscreen, mask and mechanical layers (free items; w line width, h text height)
Top Overlay:
  text "37-20" at 775,5375 h60
  text "STEF263" at 4920,4170 h60 r90
  text "STEF263" at 1925,3700 h60
  text "37-20" at 4920,3095 h60 r90
  text "37-20" at 775,2725 h60
  text "STEF263" at 4920,1520 h60 r90
  text "STEF263" at 1925,1050 h60
  text "37-20" at 4920,445 h60 r90
Top Solder:
  lines w50: 973.53,1461.9 988.1,1461.9 ; 973.53,1599.69 1000.31,1599.69 1165,1435 1200,1400 1200,1350 1360,1190 ; 973.53,4111.9 988.1,4111.9 ; 973.53,4249.69 1000.31,4249.69 1165,4085 1200,4050 1200,4000 1360,3840
  lines w80: 855.42,1737.49 973.53,1737.49 1082.49,1737.49 1115,1770 ; 855.42,4387.49 973.53,4387.49 1082.49,4387.49 1115,4420
  lines w100: 1115,1770 1115,1940 1170,1995 1455,1995 1600,1850 1600,1700 ; 1115,4420 1115,4590 1170,4645 1455,4645 1600,4500 1600,4350
Bottom Solder:
  lines w60: 1275,2450 1285,2450 ; 1275,5100 1285,5100
  lines w80: 855.42,1875.28 973.53,1875.28 1094.72,1875.28 1105,1865 1120,1865 1285,1700 ; 855.42,2013.08 1033.08,2013.08 1070,2050 1180,2050 1230,2100 1475,2100 1525,2150 1600,2225 1600,2450 ; 855.42,2150.87 975.87,2150.87 1275,2450 ; 855.42,4525.28 973.53,4525.28 1094.72,4525.28 1105,4515 1120,4515 1285,4350 ; 855.42,4663.08 1033.08,4663.08 1070,4700 1180,4700 1230,4750 1475,4750 1525,4800 1600,4875 1600,5100 ; 855.42,4800.87 975.87,4800.87 1275,5100
Mechanical 1:
  circle w0.01: c3609.84,5096.09 r20
  circle w0.01: c3609.84,4995.8 r20
  circle w0.01: c3609.84,5195.07 r20
  circle w0.01: c3609.84,3318.09 r20
  circle w0.01: c3609.84,3217.8 r20
  circle w0.01: c3609.84,3417.07 r20
  circle w0.01: c3609.84,4108.1 r20
  circle w0.01: c3609.84,4307.37 r20
  circle w0.01: c3609.84,4207.09 r20
  circle w10: c4434,3764 r61
  circle w10: c4434,4650 r61
  circle w0.01: c3609.84,2446.09 r20
  circle w0.01: c3609.84,2345.8 r20
  circle w0.01: c3609.84,2545.07 r20
  circle w0.01: c3609.84,668.09 r20
  circle w0.01: c3609.84,567.8 r20
  circle w0.01: c3609.84,767.07 r20
  circle w0.01: c3609.84,1458.1 r20
  circle w0.01: c3609.84,1657.37 r20
  circle w0.01: c3609.84,1557.09 r20
  circle w10: c4434,1114 r61
  circle w10: c4434,2000 r61
  lines w0.01: 3500,350 5000,350 5000,2470 ccw(c4700,2470) 4700,2770 3800,2770 ccw(c3800,2470) 3500,2470 3500,350 ; 3500,3000 5000,3000 5000,5120 ccw(c4700,5120) 4700,5420 3800,5420 ccw(c3800,5120) 3500,5120 3500,3000 ; 4115.82,414.05 4310.82,414.05 4310.82,456.05 4115.82,456.05 4115.82,414.05 ; 4115.82,886.49 4115.82,928.49 4310.82,928.49 4310.82,886.49 4115.82,886.49 ; 4115.82,1300.05 4310.82,1300.05 4310.82,1342.05 4115.82,1342.05 4115.82,1300.05 ; 4115.82,1772.49 4310.82,1772.49 4310.82,1814.49 4115.82,1814.49 4115.82,1772.49 ; 4115.82,2184.05 4310.82,2184.05 4310.82,2226.05 4115.82,2226.05 4115.82,2184.05 ; 4115.82,2656.49 4310.82,2656.49 4310.82,2698.49 4115.82,2698.49 4115.82,2656.49 ; 4115.82,3064.05 4310.82,3064.05 4310.82,3106.05 4115.82,3106.05 4115.82,3064.05 ; 4115.82,3536.49 4115.82,3578.49 4310.82,3578.49 4310.82,3536.49 4115.82,3536.49 ; 4115.82,3950.05 4310.82,3950.05 4310.82,3992.05 4115.82,3992.05 4115.82,3950.05 ; 4115.82,4422.49 4310.82,4422.49 4310.82,4464.49 4115.82,4464.49 4115.82,4422.49 ; 4115.82,4834.05 4310.82,4834.05 4310.82,4876.05 4115.82,4876.05 4115.82,4834.05 ; 4115.82,5306.49 4310.82,5306.49 4310.82,5348.49 4115.82,5348.49 4115.82,5306.49 ; 4556.77,414.05 4751.77,414.05 4751.77,456.05 4556.77,456.05 4556.77,414.05 ; 4556.77,886.49 4751.77,886.49 4751.77,928.49 4556.77,928.49 4556.77,886.49 ; 4556.77,1300.05 4751.77,1300.05 4751.77,1342.05 4556.77,1342.05 4556.77,1300.05 ; 4556.77,1772.49 4751.77,1772.49 4751.77,1814.49 4556.77,1814.49 4556.77,1772.49 ; 4556.77,2184.05 4751.77,2184.05 4751.77,2226.05 4556.77,2226.05 4556.77,2184.05 ; 4556.77,2656.49 4751.77,2656.49 4751.77,2698.49 4556.77,2698.49 4556.77,2656.49 ; 4556.77,3064.05 4751.77,3064.05 4751.77,3106.05 4556.77,3106.05 4556.77,3064.05 ; 4556.77,3536.49 4751.77,3536.49 4751.77,3578.49 4556.77,3578.49 4556.77,3536.49 ; 4556.77,3950.05 4751.77,3950.05 4751.77,3992.05 4556.77,3992.05 4556.77,3950.05 ; 4556.77,4422.49 4751.77,4422.49 4751.77,4464.49 4556.77,4464.49 4556.77,4422.49 ; 4556.77,4834.05 4751.77,4834.05 4751.77,4876.05 4556.77,4876.05 4556.77,4834.05 ; 4556.77,5306.49 4751.77,5306.49 4751.77,5348.49 4556.77,5348.49 4556.77,5306.49
CutToolPath:
  lines w10: 345,650 ccw(c350,650) 350,645 ; 345,650 ccw(c350,650) 350,645 ; 345,650 345,1500 225,1500 225,525 525,525 525,225 1750,225 1750,345 650,345 ; 345,2550 cw(c350,2550) 350,2555 ; 345,2550 cw(c350,2550) 350,2555 ; 345,2550 345,1700 225,1700 225,2675 525,2675 525,3175 225,3175 225,4150 345,4150 345,3300 ; 345,3300 ccw(c350,3300) 350,3295 ; 345,3300 ccw(c350,3300) 350,3295 ; 345,5200 cw(c350,5200) 350,5205 ; 345,5200 cw(c350,5200) 350,5205 ; 345,5200 345,4350 225,4350 225,5325 525,5325 525,5625 1750,5625 1750,5505 650,5505 ; 350,645 645,645 645,350 ; 350,2555 645,2555 645,2850 ; 350,3295 645,3295 645,3000 ; 350,5205 645,5205 645,5500 ; 645,350 ccw(c650,350) 650,345 ; 645,350 ccw(c650,350) 650,345 ; 645,2850 cw(c650,2850) 650,2855 ; 645,2850 cw(c650,2850) 650,2855 ; 645,3000 ccw(c650,3000) 650,2995 ; 645,3000 ccw(c650,3000) 650,2995 ; 645,5500 cw(c650,5500) 650,5505 ; 645,5500 cw(c650,5500) 650,5505 ; 650,2855 1750,2855 1750,2995 650,2995 ; 3050,345 ccw(c3050,350) 3055,350 ; 3050,345 ccw(c3050,350) 3055,350 ; 3050,345 1950,345 1950,225 3175,225 3175,525 3400,525 3400,225 4150,225 4150,345 3500,345 ; 3050,2855 cw(c3050,2850) 3055,2850 ; 3050,2855 cw(c3050,2850) 3055,2850 ; 3050,2855 1950,2855 1950,2995 3050,2995 ; 3050,2995 ccw(c3050,3000) 3055,3000 ; 3050,2995 ccw(c3050,3000) 3055,3000 ; 3050,5505 cw(c3050,5500) 3055,5500 ; 3050,5505 cw(c3050,5500) 3055,5500 ; 3050,5505 1950,5505 1950,5625 3175,5625 3350,5625 4150,5625 4150,5425 3800,5425 ccw(c3800,5120) 3495,5120 3495,4350 3355,4350 3355,5200 ; 3055,350 3055,645 3350,645 ; 3055,2850 3055,2555 3350,2555 ; 3055,3000 3055,3295 3350,3295 ; 3055,5500 3055,5205 3350,5205 ; 3350,645 ccw(c3350,650) 3355,650 ; 3350,645 ccw(c3350,650) 3355,650 ; 3350,2555 cw(c3350,2550) 3355,2550 ; 3350,2555 cw(c3350,2550) 3355,2550 ; 3350,3295 ccw(c3350,3300) 3355,3300 ; 3350,3295 ccw(c3350,3300) 3355,3300 ; 3350,5205 cw(c3350,5200) 3355,5200 ; 3350,5205 cw(c3350,5200) 3355,5200 ; 3355,650 3355,1500 3495,1500 3495,350 ; 3355,2550 3355,1700 3495,1700 3495,2470 cw(c3800,2470) 3800,2775 4150,2775 4150,2995 3500,2995 ; 3355,3300 3355,4150 3495,4150 3495,3000 ; 3495,350 ccw(c3500,350) 3500,345 ; 3495,350 ccw(c3500,350) 3500,345 ; 3495,3000 ccw(c3500,3000) 3500,2995 ; 3495,3000 ccw(c3500,3000) 3500,2995 ; 5000,345 ccw(c5000,350) 5005,350 ; 5000,345 ccw(c5000,350) 5005,350 ; 5000,345 4350,345 4350,225 5125,225 5125,1500 5005,1500 5005,350 ; 5000,2995 ccw(c5000,3000) 5005,3000 ; 5000,2995 ccw(c5000,3000) 5005,3000 ; 5000,2995 4350,2995 4350,2775 4700,2775 cw(c4700,2470) 5005,2470 5005,1700 5125,1700 5125,4150 5005,4150 5005,3000 ; 0,0 5350,0 5350,5850 0,5850 0,0 ; 4350,5425 4350,5625 5125,5625 5125,4350 5005,4350 5005,5120 ccw(c4700,5120) 4700,5425 4350,5425

## Text inside footprints (layer, text, board x,y; h text height)
Q1: Top Overlay "1" at 2502.95,4762.56 h59.05 r90; Top Overlay "3" at 2605.12,4762.56 h59.05 r90
Q1: Top Overlay "1" at 2502.95,2112.56 h59.05 r90; Top Overlay "3" at 2605.12,2112.56 h59.05 r90